# EAGLE board 076ceec5996b40a2f200207769d189ec (EAGLE 7.6.0)
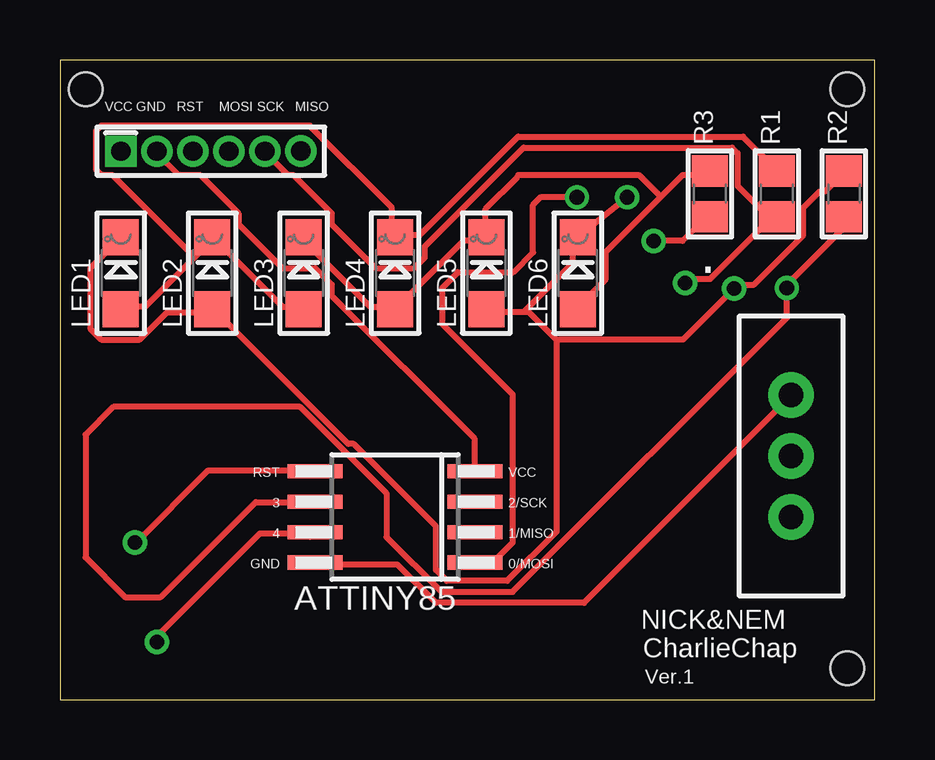
[diagram p0: board, top side]
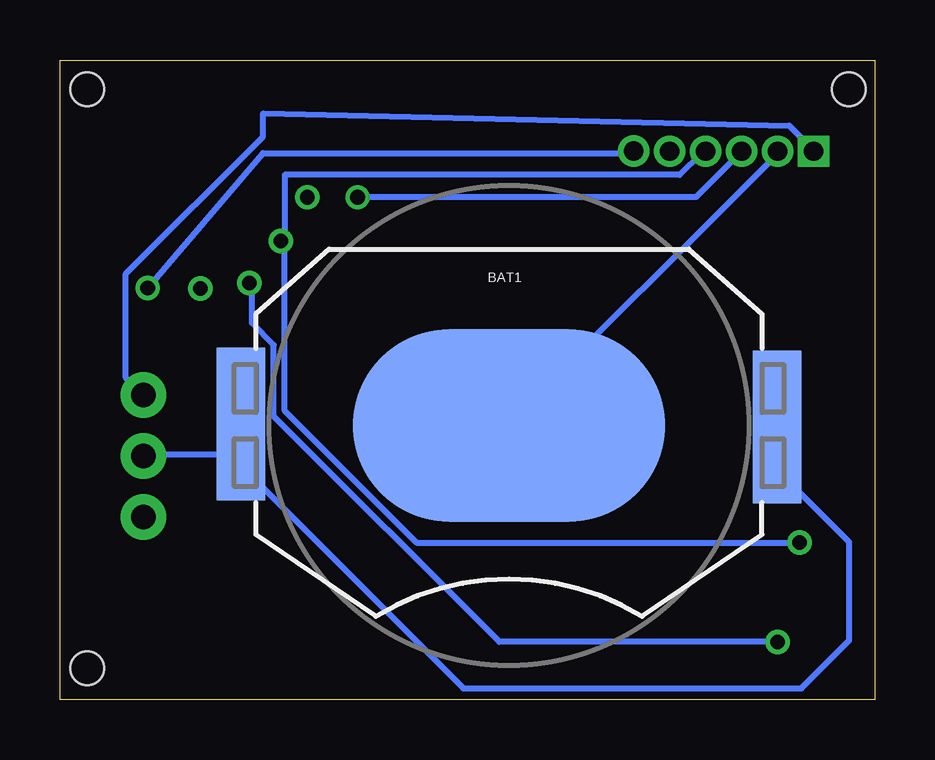
[diagram p1: board, bottom side, seen from below]

Size 33.96 x 26.66 mm. Coordinates in mm from the lower left corner, seen from the top.
Outline: 0,0 33.96,0 33.96,26.66 0,26.66 0,0
Copper layers (1*16): Top 0.035mm / dielectric 1.5mm / Bottom 0.035mm
Design rules "default": minimum track width 10mil, minimum drill 24mil, track to track 8mil, track to pad 8mil, pad to pad 8mil, via to via 8mil, smd to smd 8mil, copper to edge 40mil, drill to drill 8mil, minimum pad ring 10mil, minimum via ring 8mil, stop-mask expansion 4mil, vias tented up to drill 0mil, thermal gap 10mil
Holes 1.4 mm at 1.07,25.45 32.82,25.45 32.82,1.32

## Footprints (pad centres in the part's own frame; a part is rotated, then mirrored left to right if it is on the bottom)
SWITCH-SPDT = drill 1.016 pad 1.88: 1 0,2.54; 2 0,0; 3 0,-2.54
SOIC8_EIAJ_208MIL = smd 0.6 x 2.286: 1 -1.905,-3.33; 2 -0.635,-3.33; 3 0.635,-3.33; 4 1.905,-3.33; 5 1.905,3.33; 6 0.635,3.33; 7 -0.635,3.33; 8 -1.905,3.33
BATTCON_20MM_4LEGS = smd 13 x 8: NEGATIVE 0,0 | smd 2.032 x 3.175: POSITIVE@1 -11.176,1.651; POSITIVE@2 -11.176,-1.524; POSITIVE@3 11.176,1.524; POSITIVE@4 11.176,-1.651
CHIPLED_1206 = smd 1.5 x 1.5: A 0,-1.496; C 0,1.496
0805 = smd 1.3 x 1.5: 1 -0.95,0; 2 0.95,0
AVR_MINI_PROG = drill 0.8 pad 1.27 square: 1 0,0 | drill 0.8 pad 1.27: 2 1.5,0; 3 3,0; 4 4.5,0; 5 6,0; 6 7.5,0.01

## Placement (x,y rotation side)
.  [SWITCH-SPDT]  30.48,10.16 0 top
ATTINY85  ATTINY85-20S  [SOIC8_EIAJ_208MIL]  13.97,7.62 90 top
BAT1  20mm coincell  [BATTCON_20MM_4LEGS]  15.24,11.43 0 bottom
LED1  [CHIPLED_1206]  2.54,17.78 0 top
LED2  [CHIPLED_1206]  6.35,17.78 0 top
LED3  [CHIPLED_1206]  10.16,17.78 0 top
LED4  [CHIPLED_1206]  13.97,17.78 0 top
LED5  [CHIPLED_1206]  17.78,17.78 0 top
LED6  [CHIPLED_1206]  21.59,17.78 0 top
R1  360Ω  [0805]  29.89,21.08 90 top
R2  360Ω  [0805]  32.68,21.08 90 top
R3  360Ω  [0805]  27.09,21.08 90 top
U$1  AVR_MINI_PROGSMD  [AVR_MINI_PROG]  2.54,22.86 0 top

## Library data of the parts
. = SparkFun-Electromechanical; PROD_ID: SWCH-08261
ATTINY85 = attiny25_45_85
BAT1 = SparkFun-Electromechanical; PROD_ID: BATT-10373
LED1-LED6 R1-R3 = microbuilder
U$1 = SparkFun-Connectors

## Nets
0: ATTINY85.5 R3.1 U$1.4
1: ATTINY85.6 R2.1 U$1.6
2: ATTINY85.7 R1.1 U$1.5
3: ATTINY85.2
4: ATTINY85.3
GND: ATTINY85.4 BAT1.NEGATIVE U$1.2
N$1: ..2 BAT1.POSITIVE@1 BAT1.POSITIVE@2 BAT1.POSITIVE@3 BAT1.POSITIVE@4
N$6: LED1.C LED2.A LED5.A LED6.C R2.2
N$7: LED1.A LED2.C LED3.A LED4.C R1.2
N$8: LED3.C LED4.A LED5.C LED6.A R3.2
RESET: ATTINY85.1 U$1.3
VCC: ..1 ATTINY85.8 U$1.1

## Tracks (layer width: path | path; a pad name or v marks a point on that pad's centre or on a via)
0  (via drill 0.61)
  Top 0.254: 11.33,9.52 ATTINY85.5 10.6,9.56 6.18,9.56 3.18,6.55 v3.12,6.55 | v24.75,19.12 24.82,19.13 25.96,19.13 26.87,20.04 R3.1
  Bottom 0.254: U$1.4 7.21,22.78 8.13,21.87 24.59,21.87 24.59,19.13 v24.75,19.12 24.59,18.9 24.59,12.04 23.74,11.19 23.67,11.12 19.1,6.55 v3.12,6.55
1  (via drill 0.61)
  Top 0.254: 9.73,8.38 10.41,8.38 ATTINY85.6 10.63,8.24 8.17,8.24 4.2,4.28 2.72,4.28 1.07,5.93 1.07,11.05 2.22,12.2 10.02,12.2 13.61,8.61 13.61,6.78 15.9,4.5 18.87,4.5 30.3,15.93 v30.3,17.16 30.3,17.3 32.59,19.58 32.59,20.04 R2.1
  Bottom 0.254: v30.3,17.16 25.5,22.78 10.18,22.78 U$1.6
2  (via drill 0.61)
  Top 0.254: U$1.5 8.59,22.78 9.5,21.87 9.73,21.87 11.33,20.27 11.33,19.81 13.16,17.98 14.76,17.98 15.21,18.44 15.21,18.9 19.33,23.01 28.02,23.01 28.25,22.78 28.25,21.41 29.62,20.04 | ATTINY85.7 10.41,6.78 10.27,6.92 8.33,6.92 4.04,2.63 v4.04,2.41 | 29.62,20.04 29.85,20.27 R1.1 29.62,20.04 | 29.62,20.04 27.1,17.53 26.19,17.53 v26.06,17.37
  Bottom 0.254: v4.04,2.41 15.65,2.41 25.04,11.81 25.04,14.78 25.96,15.7 25.96,17.3 v26.06,17.37
GND
  Top 0.254: ATTINY85.4 17.27,9.52 17.27,10.9 11.33,16.84 11.33,17.3 10.64,17.98 9.27,17.98 7.44,19.81 7.44,20.27 5.84,21.87 4.93,21.87 4.01,22.78 U$1.2
  Bottom 0.254: U$1.2 4.24,22.78 4.24,22.55 15.21,11.58 BAT1.NEGATIVE
N$1
  Bottom 0.254: BAT1.POSITIVE@3 4.01,12.95 4.01,9.98 BAT1.POSITIVE@4 4.24,9.75 1.07,6.58 1.07,2.46 3.05,0.48 17.14,0.48 26.42,9.75 BAT1.POSITIVE@2 26.42,10.21 | BAT1.POSITIVE@1 26.42,10.21 | 26.42,10.21 30.3,10.21 ..2
N$6  (via drill 0.61)
  Top 0.254: LED1.C 2.41,19.13 1.27,17.98 1.27,15.47 1.73,15.01 3.33,15.01 4.47,16.15 6.3,16.15 LED2.A 6.53,16.15 12.01,10.67 12.24,10.67 15.67,7.24 15.67,5.41 16.13,4.95 18.64,4.95 20.7,7.01 20.7,15.01 | 19.33,16.15 19.56,16.15 20.7,15.01 | 19.33,16.15 17.96,16.15 LED5.A | 20.7,15.01 25.97,15.01 v28.11,17.14 28.25,17.3 28.93,17.3 30.99,19.35 30.99,20.5 31.67,21.18 31.9,21.18 32.59,21.87 R2.2 | v23.65,20.94 21.39,19.13 | 21.39,19.13 21.39,18.21 19.33,16.15 | 21.39,19.13 LED6.C
N$7
  Top 0.254: 5.61,18.44 6.3,19.13 LED2.C 6.53,19.13 9.27,16.38 9.96,16.38 LED3.A | 5.61,18.44 3.56,16.38 2.64,16.38 LED1.A | 5.61,18.44 2.18,21.87 1.73,21.87 1.5,22.1 1.5,23.7 1.73,23.93 10.41,23.93 13.84,20.5 13.84,19.35 LED4.C 14.07,19.35 14.99,19.35 19.1,23.47 28.47,23.47 29.85,22.1 R1.2
N$8
  Top 0.254: LED3.C 10.18,19.13 12.93,16.38 13.84,16.38 LED4.A 14.07,16.38 16.82,19.13 17.73,19.13 LED5.C 17.96,19.13 17.74,19.34 17.74,20.46 19.06,21.78 19.1,21.87 24.13,21.87 25.04,20.95 | 21.39,16.38 LED6.A 21.61,16.38 22.76,17.53 22.76,18.67 25.04,20.95 | 25.04,20.95 25.96,21.87 26.87,21.87 R3.2
RESET  (via drill 0.61)
  Top 0.254: ATTINY85.1 17.5,5.87 18.19,5.87 18.87,6.55 18.87,12.72 15.94,15.66 15.94,17.17 16.59,17.82 18.9,17.82 19.72,18.64 19.72,20.62 20.05,20.95 21.54,20.95 v21.55,20.94
  Bottom 0.254: U$1.3 5.61,22.78 7.45,20.94 v21.55,20.94
VCC
  Top 0.254: ATTINY85.8 10.64,5.64 14.07,5.64 15.67,4.04 21.84,4.04 30.3,12.5 ..1
  Bottom 0.254: U$1.1 2.64,23.01 3.56,23.93 25.48,24.44 25.5,24.38 25.5,23.47 31.22,17.75 31.22,13.41 30.53,12.72 ..1

## Text on the board
tNames: VCC | GND | RST | MOSI | SCK | MISO | RST | VCC | 3 | 2/SCK | 4 | 1/MISO | GND | 0/MOSI | NICK&NEM | CharlieChap | Ver.1 | /Users/nemesiscontreras/Downloads/starfishjpeg.bmp